# EAGLE board rSkinSchematic (EAGLE 5.11)

Size 100 x 80 mm. Coordinates in mm from the lower left corner, seen from the top.
Outline: 0,0 100,0 100,80 0,80 0,0
Copper layers (1*16): Top 0.035mm / dielectric 1.5mm / Bottom 0.035mm
Design rules "default": minimum track width 10mil, minimum drill 24mil, track to track 8mil, track to pad 8mil, pad to pad 8mil, via to via 8mil, smd to smd 8mil, copper to edge 40mil, drill to drill 8mil, minimum pad ring 10mil, minimum via ring 8mil, stop-mask expansion 4mil, vias tented up to drill 0mil, thermal gap 10mil

## Footprints (pad centres in the part's own frame; a part is rotated, then mirrored left to right if it is on the bottom)
TEENSY = drill 1.016 pad 1.88 round: 5V2 13.97,-2.54; +5V -13.97,7.62; B0 -11.43,-7.62; B1 -8.89,-7.62; B2 -6.35,-7.62; B3 -3.81,-7.62; B4 8.89,7.62; B5 6.35,7.62; B6 3.81,7.62; B7 -1.27,-7.62; C6 11.43,-7.62; C7 13.97,-7.62; D0 1.27,-7.62; D1 3.81,-7.62; D2 6.35,-7.62; D3 8.89,-7.62; D4 13.97,5.08; D5 13.97,-5.08; D6 13.97,7.62; D7 11.43,7.62; E6 -3.81,-5.08; F0 -11.43,7.62; F1 -8.89,7.62; F4 -6.35,7.62; F5 -3.81,7.62; F6 -1.27,7.62; F7 1.27,7.62; GRND1 13.97,0; REF -3.81,5.08; RST 13.97,2.54 | drill 1.016 pad 1.88 square: GND -13.97,-7.62
DIL24-6 = drill 0.813 long: 1 -13.97,-7.62; 2 -11.43,-7.62; 3 -8.89,-7.62; 4 -6.35,-7.62; 5 -3.81,-7.62; 6 -1.27,-7.62; 7 1.27,-7.62; 8 3.81,-7.62; 9 6.35,-7.62; 10 8.89,-7.62; 11 11.43,-7.62; 12 13.97,-7.62; 13 13.97,7.62; 14 11.43,7.62; 15 8.89,7.62; 16 6.35,7.62; 17 3.81,7.62; 18 1.27,7.62; 19 -1.27,7.62; 20 -3.81,7.62; 21 -6.35,7.62; 22 -8.89,7.62; 23 -11.43,7.62; 24 -13.97,7.62
1X10 = drill 1.016 pad 1.88 round: 1 0,0; 2 2.54,0; 3 5.08,0; 4 7.62,0; 5 10.16,0; 6 12.7,0; 7 15.24,0; 8 17.78,0; 9 20.32,0; 10 22.86,0
1X08 = drill 1.016 pad 1.88 square: 1 0,0 | drill 1.016 pad 1.88 round: 2 2.54,0; 3 5.08,0; 4 7.62,0; 5 10.16,0; 6 12.7,0; 7 15.24,0; 8 17.78,0
ALPS_POT = drill 1 pad 1.88 square: P$1 7,-2.5; P$2 7,0; P$3 7,2.5 | drill 2 octagon: P$4 0,-4.4; P$5 0,4.4

## Placement (x,y rotation side)
_1  TEENSY  [TEENSY]  12.7,40.64 90 top
IC1  4067N  [DIL24-6]  45.72,49.53 0 top
IC2  4067N  [DIL24-6]  45.72,26.67 0 top
IC3  4067N  [DIL24-6]  80.01,50.8 0 top
IC4  4067N  [DIL24-6]  80.01,25.4 0 top
JP1  M10"  [1X10]  21.59,74.93 0 top
JP2  M10"  [1X10]  49.53,74.93 0 top
JP3  M10"  [1X10]  22.86,6.35 0 top
JP4  M10"  [1X10]  50.8,6.35 0 top
JP5  [1X08]  77.47,74.93 0 top
JP6  [1X08]  78.74,6.35 0 top
U$1  [ALPS_POT]  8.89,68.58 0 top
U$2  [ALPS_POT]  8.89,12.7 0 top

## Library data of the parts
_1 = teensy
IC1-IC4 = 40xx
JP1-JP6 U$1 U$2 = SparkFun

## Nets
GND: IC1.15 IC2.15 IC3.15 IC4.15 U$1.P$2 U$2.P$2
N$1: _1.F0 IC1.1 U$2.P$1
N$2: IC2.1 U$1.P$1
N$3: _1.F4 IC3.1
N$4: _1.F5 IC4.1
N$5: _1.C6 IC1.10
N$6: _1.C7 IC1.11
N$7: _1.D6 IC1.14
N$8: _1.D7 IC1.13
N$9: _1.D2
N$10: _1.D3 IC2.10
N$11: _1.B4 IC2.14
N$12: _1.B5 IC2.13
N$13: _1.D1 IC3.10
N$14: _1.D0 IC3.11
N$15: _1.B7 IC4.10
N$16: _1.B3 IC4.11
N$17: _1.B6 IC3.14
N$18: _1.F7 IC3.13
N$19: _1.B2 IC4.14
N$20: _1.B1 IC4.13
N$21: IC1.9 JP1.10
N$22: IC1.8 JP1.9
N$23: IC1.7 JP1.8
N$24: IC1.6 JP1.7
N$25: IC1.5 JP1.6
N$26: IC1.4 JP1.5
N$27: IC1.3 JP1.4
N$28: IC1.2 JP1.3
N$29: IC1.23 JP1.2
N$30: IC1.22 JP1.1
N$31: IC1.21 JP2.10
N$32: IC1.20 JP2.9
N$33: IC1.19 JP2.8
N$34: IC1.18 JP2.7
N$35: IC1.17 JP2.6
N$36: IC1.16 JP2.5
N$37: IC2.9 JP2.4
N$38: IC2.8 JP2.3
N$39: IC2.7 JP2.2
N$40: IC2.6 JP2.1
N$41: IC2.23 JP5.8
N$42: IC2.22 JP5.7
N$43: IC2.21 JP5.6
N$44: IC2.20 JP5.5
N$45: IC2.19 JP5.4
N$46: IC2.18 JP5.3
N$47: IC2.17 JP5.2
N$48: IC2.16 JP5.1
N$49: IC3.20 JP3.1
N$50: IC3.21 JP3.2
N$51: IC3.22 JP3.3
N$52: IC3.23 JP3.4
N$53: IC3.2 JP3.5
N$54: IC3.3 JP3.6
N$55: IC3.4 JP3.7
N$56: IC3.5 JP3.8
N$57: IC3.6 JP3.9
N$58: IC3.7 JP3.10
N$59: IC3.8 JP4.1
N$60: IC3.9 JP4.2
N$61: IC4.16 JP4.3
N$62: IC4.17 JP4.4
N$63: IC4.18 JP4.5
N$64: IC4.19 JP4.6
N$65: IC4.20 JP4.7
N$66: IC4.21 JP4.8
N$67: IC4.22 JP4.9
N$68: IC4.23 JP4.10
N$69: IC4.2 JP6.1
N$70: IC4.3 JP6.2
N$71: IC4.4 JP6.3
N$72: IC4.5 JP6.4
N$73: IC4.6 JP6.5
N$74: IC4.7 JP6.6
N$75: IC4.8 JP6.7
N$76: IC4.9 JP6.8
VDD: IC1.24 IC2.24 IC3.24 IC4.24
VSS: IC1.12 IC2.12 IC3.12 IC4.12

## Tracks (layer width: path | path; a pad name or v marks a point on that pad's centre or on a via)
GND  (5 unrouted)
N$1  (2 unrouted)
N$2  (1 unrouted)
N$3  (1 unrouted)
N$4  (1 unrouted)
N$5  (1 unrouted)
N$6  (1 unrouted)
N$7  (1 unrouted)
N$8  (1 unrouted)
N$10  (1 unrouted)
N$11  (1 unrouted)
N$12  (1 unrouted)
N$13  (1 unrouted)
N$14  (1 unrouted)
N$15  (1 unrouted)
N$16  (1 unrouted)
N$17  (1 unrouted)
N$18  (1 unrouted)
N$19  (1 unrouted)
N$20  (1 unrouted)
N$21  (1 unrouted)
N$22  (1 unrouted)
N$23  (1 unrouted)
N$24  (1 unrouted)
N$25  (1 unrouted)
N$26  (1 unrouted)
N$27  (1 unrouted)
N$28  (1 unrouted)
N$29  (1 unrouted)
N$30  (1 unrouted)
N$31  (1 unrouted)
N$32  (1 unrouted)
N$33  (1 unrouted)
N$34  (1 unrouted)
N$35  (1 unrouted)
N$36  (1 unrouted)
N$37  (1 unrouted)
N$38  (1 unrouted)
N$39  (1 unrouted)
N$40  (1 unrouted)
N$41  (1 unrouted)
N$42  (1 unrouted)
N$43  (1 unrouted)
N$44  (1 unrouted)
N$45  (1 unrouted)
N$46  (1 unrouted)
N$47  (1 unrouted)
N$48  (1 unrouted)
N$49  (1 unrouted)
N$50  (1 unrouted)
N$51  (1 unrouted)
N$52  (1 unrouted)
N$53  (1 unrouted)
N$54  (1 unrouted)
N$55  (1 unrouted)
N$56  (1 unrouted)
N$57  (1 unrouted)
N$58  (1 unrouted)
N$59  (1 unrouted)
N$60  (1 unrouted)
N$61  (1 unrouted)
N$62  (1 unrouted)
N$63  (1 unrouted)
N$64  (1 unrouted)
N$65  (1 unrouted)
N$66  (1 unrouted)
N$67  (1 unrouted)
N$68  (1 unrouted)
N$69  (1 unrouted)
N$70  (1 unrouted)
N$71  (1 unrouted)
N$72  (1 unrouted)
N$73  (1 unrouted)
N$74  (1 unrouted)
N$75  (1 unrouted)
N$76  (1 unrouted)
VDD  (3 unrouted)
VSS  (3 unrouted)